# Altium PCB Amp_PCB.PcbDoc
Units mm, origin at the board's own origin, x right, y up, seen from the top; angles counter-clockwise.
Board outline 100 x 85 mm, 2 copper layers (Top Layer, Bottom Layer); 43 components, 33 nets, 178 pads, 8 vias.
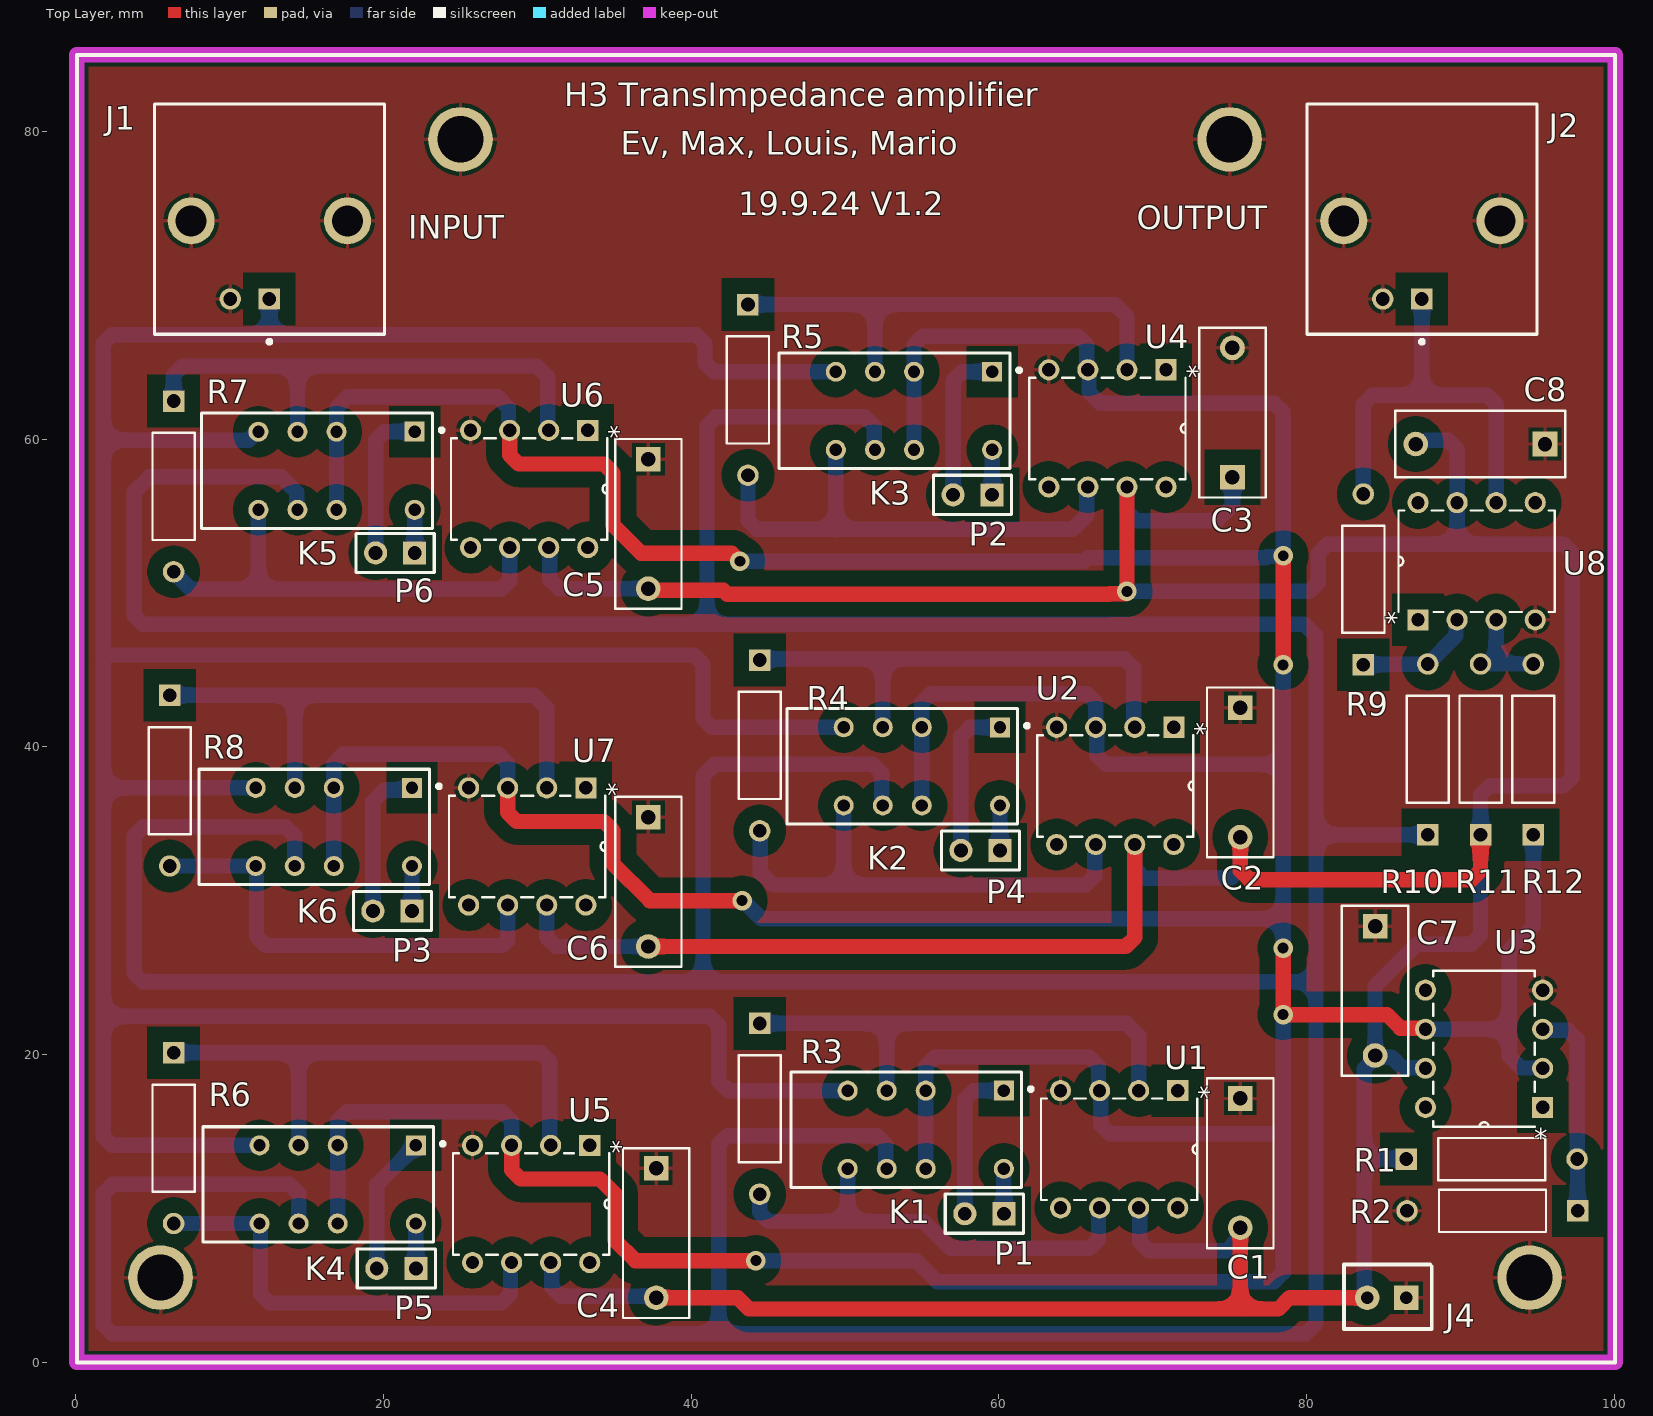
[diagram p0: Top Layer view]
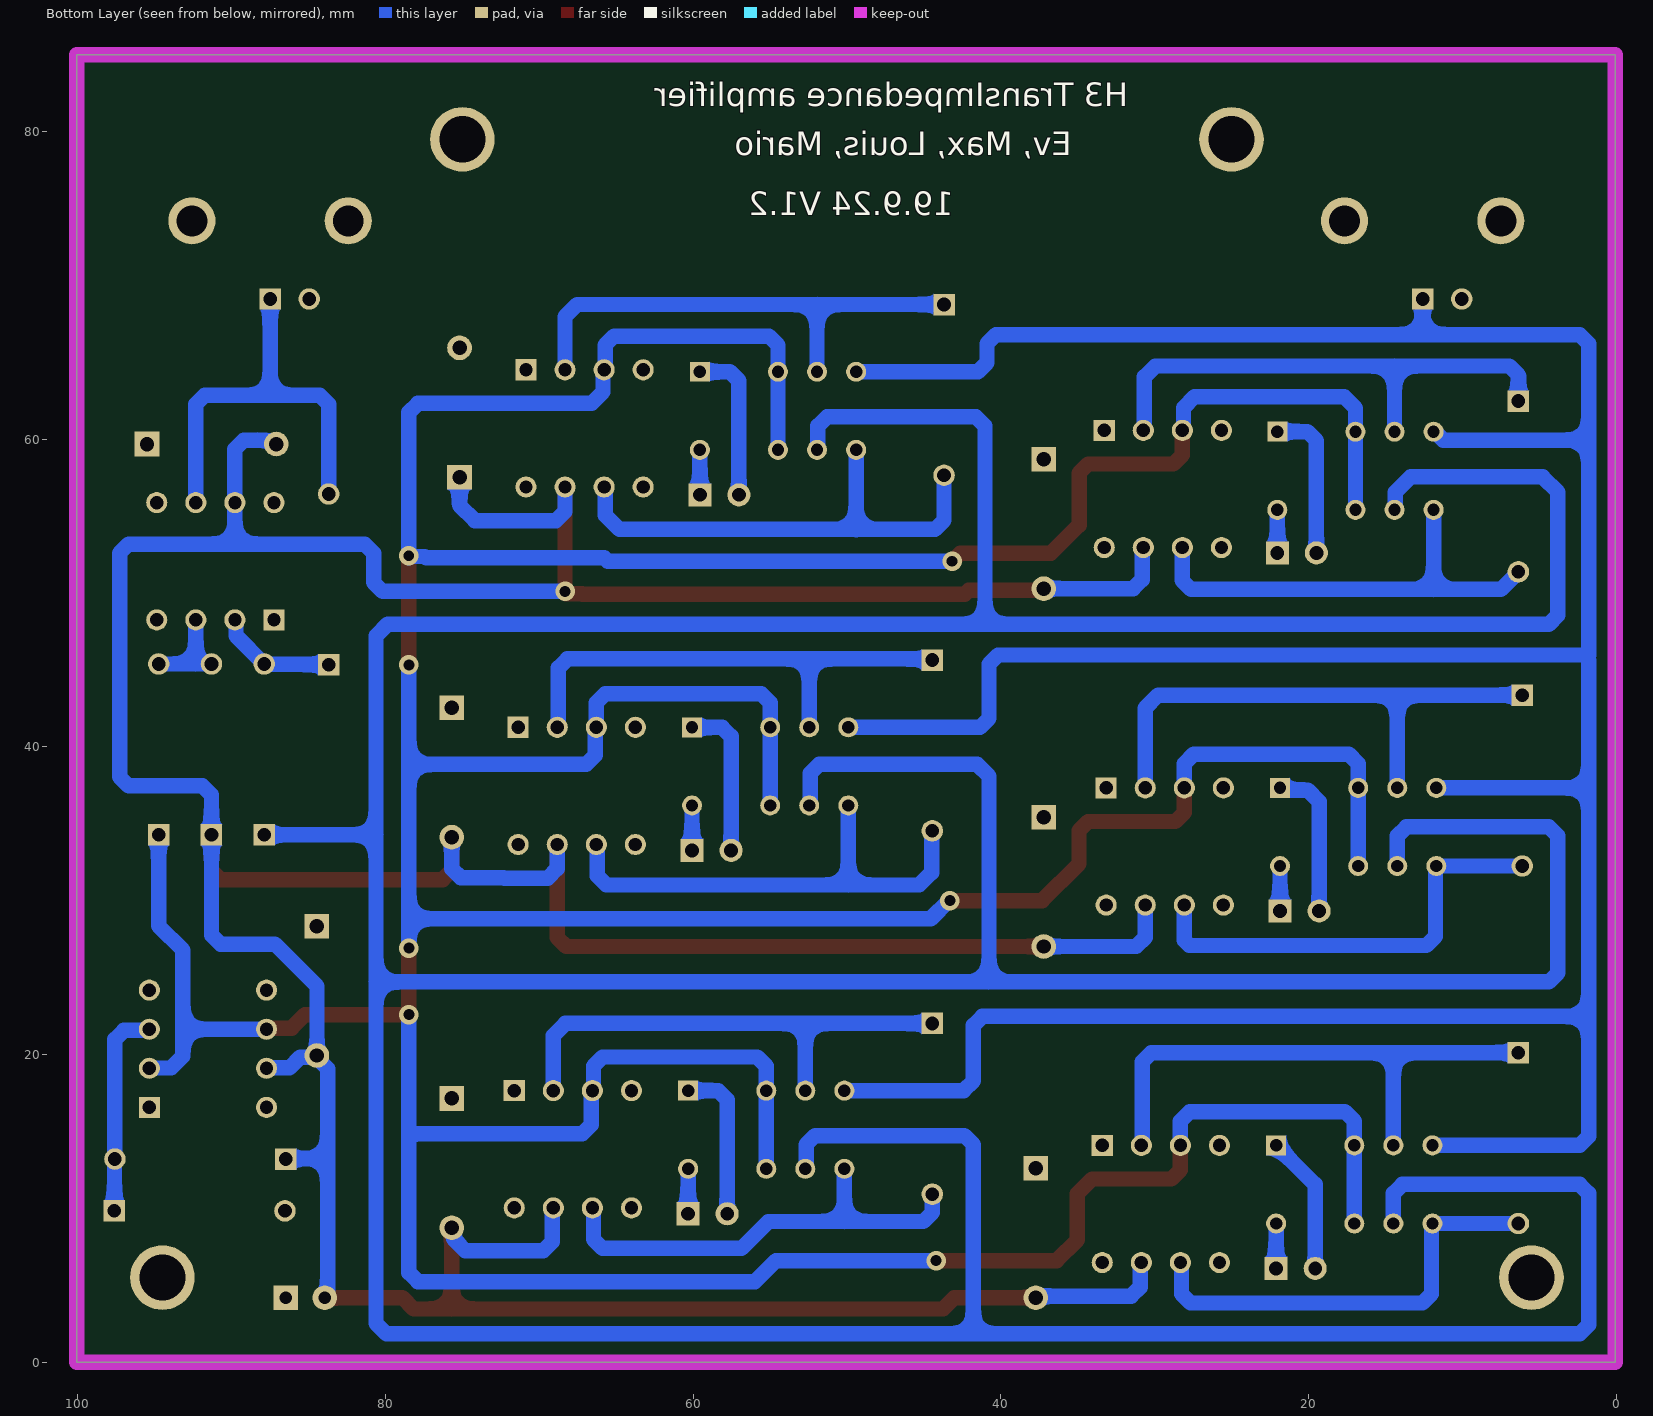
[diagram p1: Bottom Layer view, seen from below]
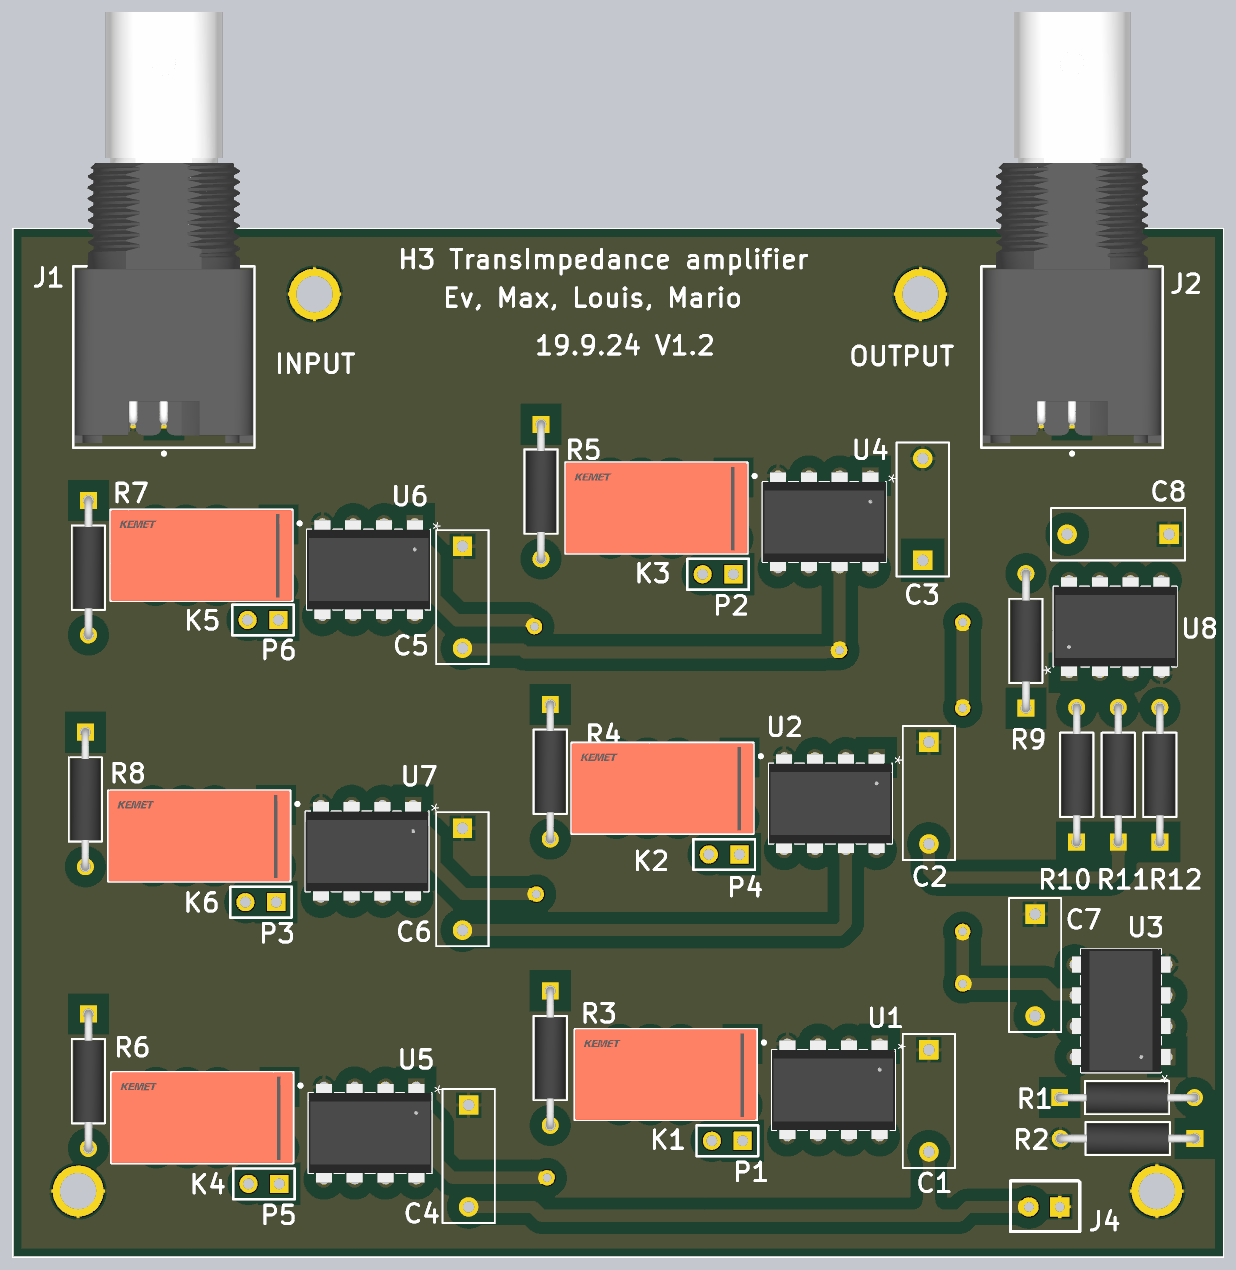
[diagram p2: 3D render of the assembled board from above, using the file's embedded part models]

## Layer stack, top to bottom
Top Solder: solder mask 0.0102, Solder Resist, Dk 3.5
Top Layer: signal copper 0.0356
Dielectric 1: dielectric 0.32, FR-4, Dk 4.8
Bottom Layer: signal copper 0.0356
Bottom Solder: solder mask 0.0102, Solder Resist, Dk 3.5

## Board outline
0.061,-0.012 0.061,84.988 100.061,84.988 100.061,-0.012

## Design rules (kind name [scope] priority, off if disabled: settings)
AssemblyTestpoint [All] p1: testpointundercomponent=TRUE minsize=1.016 maxsize=2.54 preferedsize=1.524 minholesize=0 maxholesize=1.016 preferedholesize=0.813 testpointgrid=0.025 usegrid=TRUE gridoriginx=25.527 gridoriginy=25.527 gridtolerance=0 allowsidetop=TRUE allowsidebottom=TRUE
Clearance Clearance_1 [OnMid vs OnMid] p1: gap=1 ignorepadtopadclearanceinfootprint=FALSE except(0.254: Arc-Text Arc-Hole Track-Text Track-Hole SMDPad-Text SMDPad-Hole THPad-THPad THPad-Text THPad-Hole Via-Text Via-Hole Fill-Text Fill-Hole Poly-Text Poly-Hole Region-Text Region-Hole Text-Text Text-Hole) sourcerule=38 cellrowname=All cellrowtype=0 cellcolname=All cellcoltype=0 innerlayers=TRUE
Clearance Clearance_2 [(ExistsOnLayer('Top Layer') Or ExistsOnLayer('Bottom Layer')) vs (ExistsOnLayer('Top Layer') Or ExistsOnLayer('Bottom Layer'))] p2: gap=1 ignorepadtopadclearanceinfootprint=FALSE except(0.254: Arc-Text Arc-Hole Track-Text Track-Hole SMDPad-Text SMDPad-Hole THPad-THPad THPad-Text THPad-Hole Via-Text Via-Hole Fill-Text Fill-Hole Poly-Text Poly-Hole Region-Text Region-Hole Text-Text Text-Hole) sourcerule=38 cellrowname=All cellrowtype=0 cellcolname=All cellcoltype=0 outerlayers=TRUE
Clearance [All] p3: gap=0.254 ignorepadtopadclearanceinfootprint=FALSE ismatrix=TRUE
FabricationTestpoint [All] p1: side=3 testpointundercomponent=TRUE minsize=1.016 maxsize=2.54 preferedsize=1.524 minholesize=0 maxholesize=1.016 preferedholesize=0.813 testpointgrid=0.025 allowsidetop=TRUE allowsidebottom=TRUE usegrid=TRUE gridoriginx=25.527 gridoriginy=25.527 gridtolerance=0
PolygonConnect [All] p1: connectstyle=Relief reliefconductorwidth=0.254 reliefentries=4 polygonreliefangle="90 Angle" airgapwidth=0.254
RoutingVias [All] p1: holewidth=0.711 width=1.27 viastyle="Through Hole" minholewidth=0.711 minwidth=1.27 maxholewidth=0.711 maxwidth=1.27
SolderMaskExpansion [All] p1: expansion=0.102 istentingtop=FALSE
Width MaxMinWidth_2 [All] p1: maxlimit=2 minlimit=1 preferedwidth=1 minimp=50.000000 maximp=50.000000 favimp=50.000000
Width MaxMinWidth_1 [All] p2: maxlimit=2 minlimit=1 preferedwidth=1 minimp=50.000000 maximp=50.000000 favimp=50.000000
Width [All] p3: maxlimit=0.254 minlimit=0.254 preferedwidth=0.254
28 further rules are at their usual default settings.

## Components (designator, comment, footprint, x,y, rotation, side; value= is the part's Value field where it differs from the comment)
C1 "Cap" "Resistor 1/4" 75.565,12.954 r270 top
C2 "Cap" "Resistor 1/4" 75.565,38.354 r270 top
C3 "Cap" "Resistor 1/4" 75.311,61.722 r90 top
C4 "Cap" "Resistor 1/4" 37.592,8.407 r270 top
C5 "Cap" "Resistor 1/4" 37.084,54.508 r270 top
C6 "Cap" "Resistor 1/4" 37.084,31.242 r270 top
C7 "Cap" "Resistor 1/4" 84.328,24.155 r270 top
C8 "Cap" "Resistor 1/4" 91.313,59.817 r180 top
J1 "5227161-6" FP-5227161-6-MFG 12.573,85 r0 top
J2 "5227161-6" FP-5227161-6-MFG 87.5,85 r0 top
J4 "2-Pin Header" "2 Pin header" 85.217,4.318 r180 top
K1 "Relay" Relay 53.975,15.113 r180 top
K2 "Relay" Relay 53.721,38.735 r180 top
K3 "Relay" Relay 53.213,61.849 r180 top
K4 "Relay" Relay 15.748,11.557 r180 top
K5 "Relay" Relay 15.672,57.951 r180 top
K6 "Relay" Relay 15.494,34.798 r180 top
P1 "Header 2" HDR1X2 60.325,9.652 r180 top
P2 "Header 2" HDR1X2 59.563,56.388 r180 top
P3 "Header 2" HDR1X2 21.844,29.337 r180 top
P4 "Header 2" HDR1X2 60.071,33.274 r180 top
P5 "Header 2" HDR1X2 22.098,6.096 r180 top
P6 "Header 2" HDR1X2 22.022,52.617 r180 top
R1 "Resistor 1/4W" "Resistor 0.4W" 92.075,13.208 r0 top
R2 "Resistor 1/4W" "Resistor 0.4W" 92.051,9.836 r180 top
R3 "Resistor 1/4W" "Resistor 0.4W" 44.45,16.436 r270 top
R4 "Resistor 1/4W" "Resistor 0.4W" 44.45,40.058 r270 top
R5 "Resistor 1/4W" "Resistor 0.4W" 43.688,63.172 r270 top
R6 "Resistor 1/4W" "Resistor 0.4W" 6.35,14.531 r270 top
R7 "Resistor 1/4W" "Resistor 0.4W" 6.35,56.896 r270 top
R8 "Resistor 1/4W" "Resistor 0.4W" 6.096,37.772 r270 top
R9 "Resistor 1/4W" "Resistor 0.4W" 83.693,50.927 r90 top
R10 "Resistor 1/4W" "Resistor 0.4W" 87.884,39.878 r90 top
R11 "Resistor 1/4W" "Resistor 0.4W" 91.313,39.878 r90 top
R12 "Resistor 1/4W" "Resistor 0.4W" 94.742,39.878 r90 top
U1 "TL031CP" P8 67.945,13.843 r270 top
U2 "TL031CP" P8 67.691,37.465 r270 top
U3 "TL031CP" P8 91.543,20.25 r180 top
U4 "TL031CP" P8 67.183,60.706 r270 top
U5 "TL031CP" P8 29.718,10.287 r270 top
U6 "TL031CP" P8 29.591,56.769 r270 top
U7 "TL031CP" P8 29.464,33.528 r270 top
U8 "TL031CP" P8 90.932,52.07 r90 top

## Footprints (in the part's own frame and the unit in brackets; to place one, negate y for a bottom-side part, rotate by r counter-clockwise, add the part's x,y. Pads: shape width x height; smd on the part's side, far side on the other; paste and mask are expansions set on the pad)
"2 Pin header" [mm]
  rect 1.6x1.6 hole 0.8: 0(-1.27,0.127)
  round 1.6 hole 0.8: 1(1.27,0.127)
  silkscreen extent -2.92,-2.03 2.79,2.16
FP-5227161-6-MFG [mm]
  rect 1.39x1.39 hole 0.89 paste-2539.97 mask+0: 1(0,-15.88)
  round 1.39 hole 0.89 paste-2539.97 mask+0: 2(-2.54,-15.88)
  round 3.06 hole 2.01 paste-2539.97 mask+0: 3(-5.08,-10.8) 4(5.08,-10.8)
  silkscreen extent -7.48,-18.78 7.48,-3.21, body extent -7.58,-18.28 7.58,18.28, height 0.25
HDR1X2 [mm] "Connector; Header; 2 Position"
  rect 1.5x1.5 hole 0.9: 1(0,0)
  round 1.5 hole 0.9: 2(2.54,0)
  silkscreen extent -1.27,-1.27 3.81,1.27
P8 [mil]
  rect 54x54 / inner round 60 / far side rect 54x54 hole 34 paste-99999 mask-27: 1(-150,145)
  round 54 / inner round 60 / far side round 54 hole 34 paste-99999 mask-27: 2(-150,45) 3(-150,-55) 4(-150,-155) 5(150,-155) 6(150,-55) 7(150,45) 8(150,145)
  silkscreen extent -130,-205 130,195, body extent -160,-205 160,195, height 205
Relay [mm]
  rect 1.3x1.3 hole 0.8 paste-2539.97 mask+0: 1(-6.35,-2.54)
  round 1.3 hole 0.8 paste-2539.97 mask+0: 3(-1.27,-2.54) 4(1.27,-2.54) 5(3.81,-2.54) 8(3.81,2.54) 9(1.27,2.54) 10(-1.27,2.54) 12(-6.35,2.54)
  silkscreen extent -8.23,-3.75 7.5,3.75, body extent -7.6,-3.85 7.6,3.85, height 0.25
"Resistor 0.4W" [mil]
  rect 55x55 / inner round 60 / far side rect 55x55 hole 35 paste-99999 mask+0: 1(-220,0)
  round 55 / inner round 60 / far side round 55 hole 35 paste-99999 mask+0: 2(217.1,0)
  silkscreen extent -138,-54 136,54, body extent -232,-49 230,49, height 98
"Resistor 1/4" [mil]
  rect 62.99x62.99 hole 37 paste-99999 mask+0: 1(-165,5)
  round 62.99 hole 37 paste-99999 mask+0: 2(166,5)
  silkscreen extent -217,-80 218,90

## Part data
J1 J2: library part CMP-03790-39546762-1, "5227161-6 RF Connector, BNC, Jack, 50 Ohm, Right Angle PCB Mount, Commecial Grade", Color=Black, Dielectric Material=Polymethylpentene, Frequency=4GHz, Insulation Resistance=5GΩ, Manufacturer Lifecycle Status=ACTIVE, Max Operating Temperature=85°C, Min Operating Temperature=-55°C, Voltage Rating=500V, Body Material=Zinc, Body Plating=Nickel, Connector Type=BNC, Contact Material=Gold, Contact Plating=Gold, Depth=34.93mm, Fastening Type=Bayonet, Gender=Female, Height=16.13mm, Housing Color=Black, Housing Material=Polyester, Impedance=50Ω, Insulation Material=Polymethylpentene, Lead Free="Lead Free", Length=34.93mm, Lifecycle Status=Production, Max Frequency=4GHz, Mount=Panel, NexarPartId=39546762, Number of Contacts=1, Number of Positions=1, Orientation="Right Angle", Outside Diameter=14.529mm, Packaging=Bulk, PCB Mounting Orientation="Right Angle", Polarity="Normal, Standard", Radiation Hardening=No, REACH SVHC="No SVHC", RoHS=Compliant, Sealable=No, Tail Length=4.11mm, Termination="Solder, Through Hole"
P1 P2 P3 P4 P5 P6: "Header, 2-Pin", LatestRevisionDate=17-Jul-2002, LatestRevisionNote="Re-released for DXP Platform.", Publisher="Altium Limited"
R1 R2 R3 R4 R5 R6 R7 R8 R9 R10 R11 R12: Mfr_Name=Vishay
U1 U2 U3 U4 U5 U6 U7 U8: "No Description Available", Mfr_Name="Texas Instruments", RefDes=RefDes, Type=Type

## Free pads (board coordinates)
  round 4.2 hole 3 paste-2539.97: 4(5.5,5.5) 4(25,79.5) 4(75,79.5) 4(94.5,5.5)

## Via types
v1: diameter 1.27, hole 0.711, Top Layer to Bottom Layer, 8 vias

## Nets (pads, with @x,y where several pads share a name; then routed paths per layer and width w, separated by ;. In a path a pad name is that pad's centre, name@x,y a point inside that pad or via, vN(x,y) a via of type N, cw(c..) or ccw(c..) an arc to the next point about the centre after c; other vN are vias at no path point)
GND: C1.1 C2.1 C3.2 C4.1 C5.1 C6.1 C7.1 C8.1 J1.2 J1.3 J1.4 J2.2 J2.3 J2.4 J4.0 pad.4 R2.2 U1.4 U2.4 U3.4 U4.4 U5.4 U6.4 U7.4 U8.4
In: J1.1 K1.5 K2.5 K3.5 K4.5 K5.5 K6.5 | length 238.3
  Bottom Layer w1: 1.778,45.642 1.778,37.338 ; K6.5@11.603,37.338 1.778,37.338 ; K5.5 11.781,60.491 11.234,59.944 1.778,59.944 ; K4.5 2.364,14.097 1.778,14.683 1.778,22.479 ; J1.1 12.573,66.802 ; K3.5 41.48,64.389 40.894,64.975 40.894,66.216 40.308,66.802 12.573,66.802 ; K2.5 41.353,41.275 40.767,41.861 40.767,45.388 40.181,45.974 1.778,45.974 1.778,59.944 ; K1.5 42.418,17.653 41.783,18.288 41.783,21.893 41.197,22.479 1.778,22.479 ; 1.778,22.479 1.778,37.338 ; 1.778,59.944 1.778,66.216 2.364,66.802 12.573,66.802
K1+: K1.1 P1.2 | length 10.2
  Bottom Layer w1: P1.2 57.785,17.067 58.371,17.653 K1.1
K1-: K1.12 P1.1 | length 2.9
  Bottom Layer w1: P1.1 K1.12
K2+: K2.1 P4.2 | length 10.2
  Bottom Layer w1: P4.2 57.531,40.689 58.117,41.275 K2.1
K2-: K2.12 P4.1 | length 2.9
  Bottom Layer w1: P4.1 K2.12
K3+: K3.1 P2.2 | length 10.2
  Bottom Layer w1: P2.2 57.023,63.803 57.609,64.389 K3.1
K3-: K3.12 P2.1 | length 2.9
  Bottom Layer w1: P2.1 K3.12
K4+: K4.1 P5.2 | length 9.1
  Bottom Layer w1: P5.2 19.558,11.557 K4.1
K4-: K4.12 P5.1 | length 2.9
  Bottom Layer w1: P5.1 K4.12
K5+: K5.1 P6.2 | length 10.1
  Bottom Layer w1: P6.2 19.482,59.905 20.068,60.491 K5.1
K5-: K5.12 P6.1 | length 2.9
  Bottom Layer w1: P6.1@21.895,52.49 P6.1 K5.12@22.022,55.33
K6+: K6.1 P3.2 | length 10
  Bottom Layer w1: P3.2 19.304,36.449 20.043,37.188 21.694,37.188 K6.1
K6-: K6.12 P3.1 | length 2.9
  Bottom Layer w1: P3.1 K6.12
NetK1_4: K1.4 R3.1 U1.2 | length 32.9
  Bottom Layer w1: R3.1 52.705,22.024 ; K1.4@52.705,17.734 52.705,22.024 ; U1.2@69.017,17.724 U1.2 69.088,21.24 68.304,22.024 52.705,22.024
NetK1_8: K1.8 R3.2 U1.6 | length 29.8
  Bottom Layer w1: R3.2 44.45,9.73 45.036,9.144 50.165,9.144 ; K1.8@50.165,12.492 50.165,9.144 ; U1.6 66.477,9.962 66.477,7.988 65.891,7.402 56.853,7.402 55.651,8.604 55.111,9.144 50.165,9.144
NetK2_4: K2.4 R4.1 U2.2 | length 32.8
  Bottom Layer w1: R4.1 44.524,45.72 52.451,45.72 ; K2.4@52.451,41.356 52.451,45.72 ; U2.2 68.763,41.346 68.763,45.134 68.177,45.72 52.451,45.72
NetK2_8: K2.8 R4.2 U2.6 | length 32.3
  Bottom Layer w1: R4.2 44.497,34.497 44.497,31.83 45.303,31.024 49.911,31.024 ; K2.8 49.911,31.024 ; U2.6 66.223,33.584 66.223,31.61 65.637,31.024 49.911,31.024
NetK3_4: K3.4 R5.1 U4.2 | length 32.9
  Bottom Layer w1: R5.1 51.943,68.76 ; K3.4 51.943,68.76 ; U4.2@68.255,64.587 U4.2 68.326,67.976 67.542,68.76 51.943,68.76
NetK3_8: K3.8 R5.2 U4.6 | length 32.6
  Bottom Layer w1: R5.2 43.688,54.724 44.274,54.138 49.403,54.138 ; 49.403,54.102 49.403,54.138 ; K3.8@49.403,59.228 49.403,54.138 ; U4.6 65.715,56.825 65.715,55.069 64.784,54.138 49.403,54.138
NetK4_4: K4.4 R6.1 U5.2 | length 36.2
  Bottom Layer w1: R6.1 14.478,20.119 ; K4.4 14.478,20.119 ; U5.2 30.791,14.167 30.791,19.534 30.205,20.119 14.478,20.119
NetK4_8: K4.8 R6.2 U5.6 | length 29
  Bottom Layer w1: R6.2 K4.8 11.995,8.96 11.995,4.432 12.581,3.846 27.664,3.846 28.25,4.432 28.25,6.406 U5.6
NetK5_4: K5.4 R7.1 U6.2 | length 34.3
  Bottom Layer w1: R7.1 6.35,64.179 6.936,64.765 14.402,64.765 ; K5.4 14.402,64.765 ; U6.2 30.663,60.65 30.663,64.057 29.955,64.765 14.402,64.765
NetK5_8: K5.8 R7.2 U6.6 | length 29.9
  Bottom Layer w1: R7.2 7.492,50.24 11.862,50.24 ; K5.8 11.862,50.24 ; U6.6@28.204,52.969 28.204,50.826 27.618,50.24 11.862,50.24
NetK6_4: K6.4 R8.1 U7.2 | length 36.1
  Bottom Layer w1: R8.1 14.224,43.36 ; K6.4 14.224,43.36 ; U7.2 30.607,42.521 29.767,43.36 14.224,43.36
NetK6_8: K6.8 R8.2 U7.6 | length 29.3
  Bottom Layer w1: R8.2 K6.8 11.741,32.201 11.741,27.673 12.327,27.087 27.735,27.087 28.067,27.419 U7.6 ; U7.6@28.067,29.744 U7.6@28.067,29.845
NetR1_2: R1.2 R2.1 U3.3 | length 13.7
  Bottom Layer w1: U3.3 95.424,21.576 97.004,21.576 97.589,20.99 R1.2 97.614,13.183 97.614,9.861 R2.1
NetR9_1: R9.1 R10.2 U8.2 | length 7.9
  Bottom Layer w1: R9.1 83.72,45.366 87.857,45.366 R10.2 89.718,47.226 89.718,48.189 U8.2
NetR11_2: R11.2 R12.2 U8.3 | length 6.3
  Bottom Layer w1: R11.2 92.329,45.392 ; U8.3 92.329,45.392 ; R12.2 92.329,45.392
Out: K1.9 K2.9 K3.9 K4.9 K5.9 K6.9 R10.1 | length 430.2
  Bottom Layer w1: K6.9@14.224,32.339 14.224,34.212 13.638,34.798 4.364,34.798 3.778,34.212 3.778,25.311 4.364,24.726 40.767,24.726 ; K5.9 14.344,55.468 14.344,56.564 13.348,57.561 4.775,57.561 3.778,56.564 3.778,48.56 4.364,47.974 41.021,47.974 ; K4.9@14.478,9.098 14.478,10.971 13.892,11.557 2.364,11.557 1.778,10.971 1.778,2.432 2.364,1.846 41.783,1.846 ; K3.9@51.886,59.448 51.886,60.873 51.3,61.459 41.607,61.459 41.021,60.873 41.021,47.974 ; K2.9 52.394,36.252 52.394,38.276 51.808,38.862 41.529,38.862 40.767,38.1 40.767,24.726 ; K1.9@52.705,12.654 52.648,12.712 52.648,14.146 52.062,14.732 42.369,14.732 41.783,14.146 41.783,1.846 ; R10.1 80.613,34.29 ; 40.767,24.726 80.613,24.726 ; 41.021,47.974 79.854,47.974 80.613,47.215 80.613,34.29 ; 41.783,1.846 79.932,1.846 80.613,2.527 80.613,24.726 ; 80.613,24.726 80.613,34.29
VCC: C1.2 C2.2 C3.1 C4.2 C5.2 C6.2 C7.2 C8.2 J4.1 R1.1 R11.1 U1.7 U2.7 U3.7 U4.7 U5.7 U6.7 U7.7 U8.7 | length 313.2
  Top Layer w1: C6.2 68.248,27.026 68.834,27.611 U2.7 ; C5.2 37.326,50.177 42.097,50.177 42.339,49.935 67.191,49.935 67.218,49.962 68.274,49.962 v1@68.326,50.014 ; C4.2 43.019,4.191 43.749,3.461 75.692,3.461 ; v1@68.326,50.038 U4.7 ; C1.2 75.692,3.461 ; C2.2 75.692,31.955 76.278,31.369 90.727,31.369 91.313,31.955 R11.1 ; J4.1 78.901,4.191 78.171,3.461 75.692,3.461
  Bottom Layer w1: U7.7 30.607,27.611 31.193,27.026 C6.2 ; U6.7 30.805,52.888 30.805,50.878 31.391,50.292 C5.2 ; U5.7 30.932,6.406 30.932,4.877 31.518,4.291 37.619,4.291 C4.2 ; v1(68.326,50.109) 80.186,50.109 80.772,50.695 80.772,52.598 81.358,53.184 89.789,53.184 ; U4.7 68.326,55.296 68.912,54.71 74.19,54.71 75.184,55.704 C3.1 ; U2.7 68.834,32.082 69.447,31.469 72.279,31.469 72.306,31.496 75.106,31.496 75.692,32.082 C2.2 ; U1.7 69.159,9.962 69.159,7.825 69.745,7.239 74.806,7.239 75.577,8.01 75.577,8.623 C1.2 ; J4.1 83.832,4.306 83.832,4.73 83.762,4.801 83.762,13.249 ; R1.1@86.446,13.249 83.762,13.249 ; C8.2 87.211,59.805 87.636,59.805 87.775,59.944 89.203,59.944 89.789,59.358 U8.7 89.789,53.184 ; U3.7 87.703,19.138 86.238,19.138 85.551,19.824 84.57,19.824 C7.2 ; 83.762,13.249 83.762,19.083 84.455,19.777 C7.2 ; C7.2 84.455,24.445 87.188,27.178 90.727,27.178 91.313,27.764 R11.1 91.313,36.879 91.899,37.465 96.696,37.465 97.282,38.051 97.282,52.598 96.696,53.184 89.789,53.184
VOut: J2.1 R9.2 U8.6 | length 27.6
  Bottom Layer w1: R9.2 83.693,62.279 84.279,62.865 87.5,62.865 ; J2.1 87.5,62.865 ; U8.6 92.329,62.279 91.743,62.865 87.5,62.865
Vref: K1.3 K1.10 K2.3 K2.10 K3.3 K3.10 K4.3 K4.10 K5.3 K5.10 K6.3 K6.10 R12.1 U1.3 U2.3 U3.2 U3.6 U4.3 U5.3 U6.3 U7.3 | length 421.7
  Top Layer w1: U7.3 28.067,35.738 28.653,35.152 34.325,35.152 34.911,34.566 34.911,32.399 37.309,30.001 v1@43.234,30.001 ; U6.3 28.194,58.979 28.78,58.393 34.317,58.393 34.908,57.802 34.908,54.416 36.732,52.592 42.629,52.592 43.151,52.07 v1(43.156,52.07) ; U5.3 28.321,12.497 28.907,11.911 34.063,11.911 35.02,10.954 35.02,7.949 36.365,6.604 v1(44.196,6.604) ; U4.3 U4.3@65.857,64.445 ; U2.3 U2.3@66.365,41.204 ; U1.3 U1.3@66.619,17.582 ; v1@78.478,26.851 v1(78.478,22.591) 85.232,22.591 86.105,21.718 87.662,21.718 U3.6 ; v1(78.478,45.339) 78.482,45.343 78.482,52.423 v1(78.486,52.427)
  Bottom Layer w1: K6.10 K6.3 16.764,38.911 17.377,39.524 27.454,39.524 28.067,38.911 U7.3 ; K5.10 16.942,62.027 17.68,62.765 27.405,62.765 28.123,62.047 U6.3@28.123,60.562 ; K4.10 K4.3 17.018,15.67 17.631,16.283 27.708,16.283 28.321,15.67 U5.3 ; v1(43.156,52.07) 65.545,52.07 65.767,52.292 77.351,52.292 77.434,52.375 78.413,52.375 78.486,52.302 78.486,61.744 77.9,62.33 66.597,62.33 65.857,63.07 65.857,64.445 U4.3 65.715,64.587 65.715,66.116 65.129,66.702 55.069,66.702 54.483,66.116 K3.3 K3.10 ; v1(43.307,30.001) 43.38,30.001 44.552,28.829 78.478,28.829 ; v1@44.269,6.604 54.61,6.604 55.975,5.239 77.892,5.239 78.478,5.825 v1(78.478,22.591) ; K2.10 K2.3 54.991,42.875 55.577,43.461 65.708,43.461 66.294,42.875 U2.3 66.365,41.204 66.365,39.448 66.951,38.862 78.478,38.862 ; K1.10 K1.3 55.245,19.253 55.831,19.839 65.891,19.839 66.477,19.253 66.477,17.724 U1.3 66.619,17.582 66.619,15.445 67.219,14.845 77.113,14.845 77.127,14.859 78.027,14.859 78.105,14.781 ; v1(78.478,26.924) 78.478,28.829 ; v1(78.478,45.339) 78.478,38.862 ; U3.6 93.167,21.647 ; R12.1 94.742,28.364 93.167,26.79 93.167,21.647 ; U3.2 95.332,19.128 93.931,19.128 93.167,19.891 93.167,21.647 ; 78.478,28.829 78.478,38.862
pads on no net: U1.1 U1.5 U1.8 U2.1 U2.5 U2.8 U3.1 U3.5 U3.8 U4.1 U4.5 U4.8 U5.1 U5.5 U5.8 U6.1 U6.5 U6.8 U7.1 U7.5 U7.8 U8.1 U8.5 U8.8

## Polygon pours and split planes (outlines as drawn)
GND on Top Layer "GND_L01_P000" (solid, pour order 0): 0.381,84.836 0,84.455 0,0 99.314,0 99.695,-0.381 100.33,0.254 100.33,85.09

## Keep-outs
Keep-Out Layer:
  the board outline again, w1

## Silkscreen, mask and mechanical layers (free items; w line width, h text height)
Top Overlay:
  the board outline again, w0.254
  text "H3 TransImpedance amplifier" at 31.75,81.661 h1.52
  text "Ev, Max, Louis, Mario" at 35.433,78.486 h1.52
  text "19.9.24 V1.2" at 43.053,74.549 h1.52
  text "OUTPUT" at 68.961,73.66 h1.52
  text "INPUT" at 21.59,73.025 h1.52
Bottom Overlay:
  text "H3 TransImpedance amplifier" at 31.716,81.658 h1.52
  text "Ev, Max, Louis, Mario" at 35.395,78.468 h1.52
  text "19.9.24 V1.2" at 43.053,74.549 h1.52

## Text inside footprints (layer, text, board x,y; h text height)
U1: Top 3D Body "*" at 72.441,17.97 h1.27 r270; Top Overlay "*" at 72.441,17.97 h1.27 r270
U2: Top 3D Body "*" at 72.187,41.593 h1.27 r270; Top Overlay "*" at 72.187,41.593 h1.27 r270
U3: Top 3D Body "*" at 95.671,15.754 h1.27 r180; Top Overlay "*" at 95.671,15.754 h1.27 r180
U4: Top 3D Body "*" at 71.679,64.834 h1.27 r270; Top Overlay "*" at 71.679,64.834 h1.27 r270
U5: Top 3D Body "*" at 34.214,14.414 h1.27 r270; Top Overlay "*" at 34.214,14.414 h1.27 r270
U6: Top 3D Body "*" at 34.087,60.896 h1.27 r270; Top Overlay "*" at 34.087,60.896 h1.27 r270
U7: Top 3D Body "*" at 33.96,37.655 h1.27 r270; Top Overlay "*" at 33.96,37.655 h1.27 r270
U8: Top 3D Body "*" at 86.436,47.942 h1.27 r90; Top Overlay "*" at 86.436,47.942 h1.27 r90